# EAGLE board module_RevC_panelized (EAGLE 9.1.1), part 1 of 2
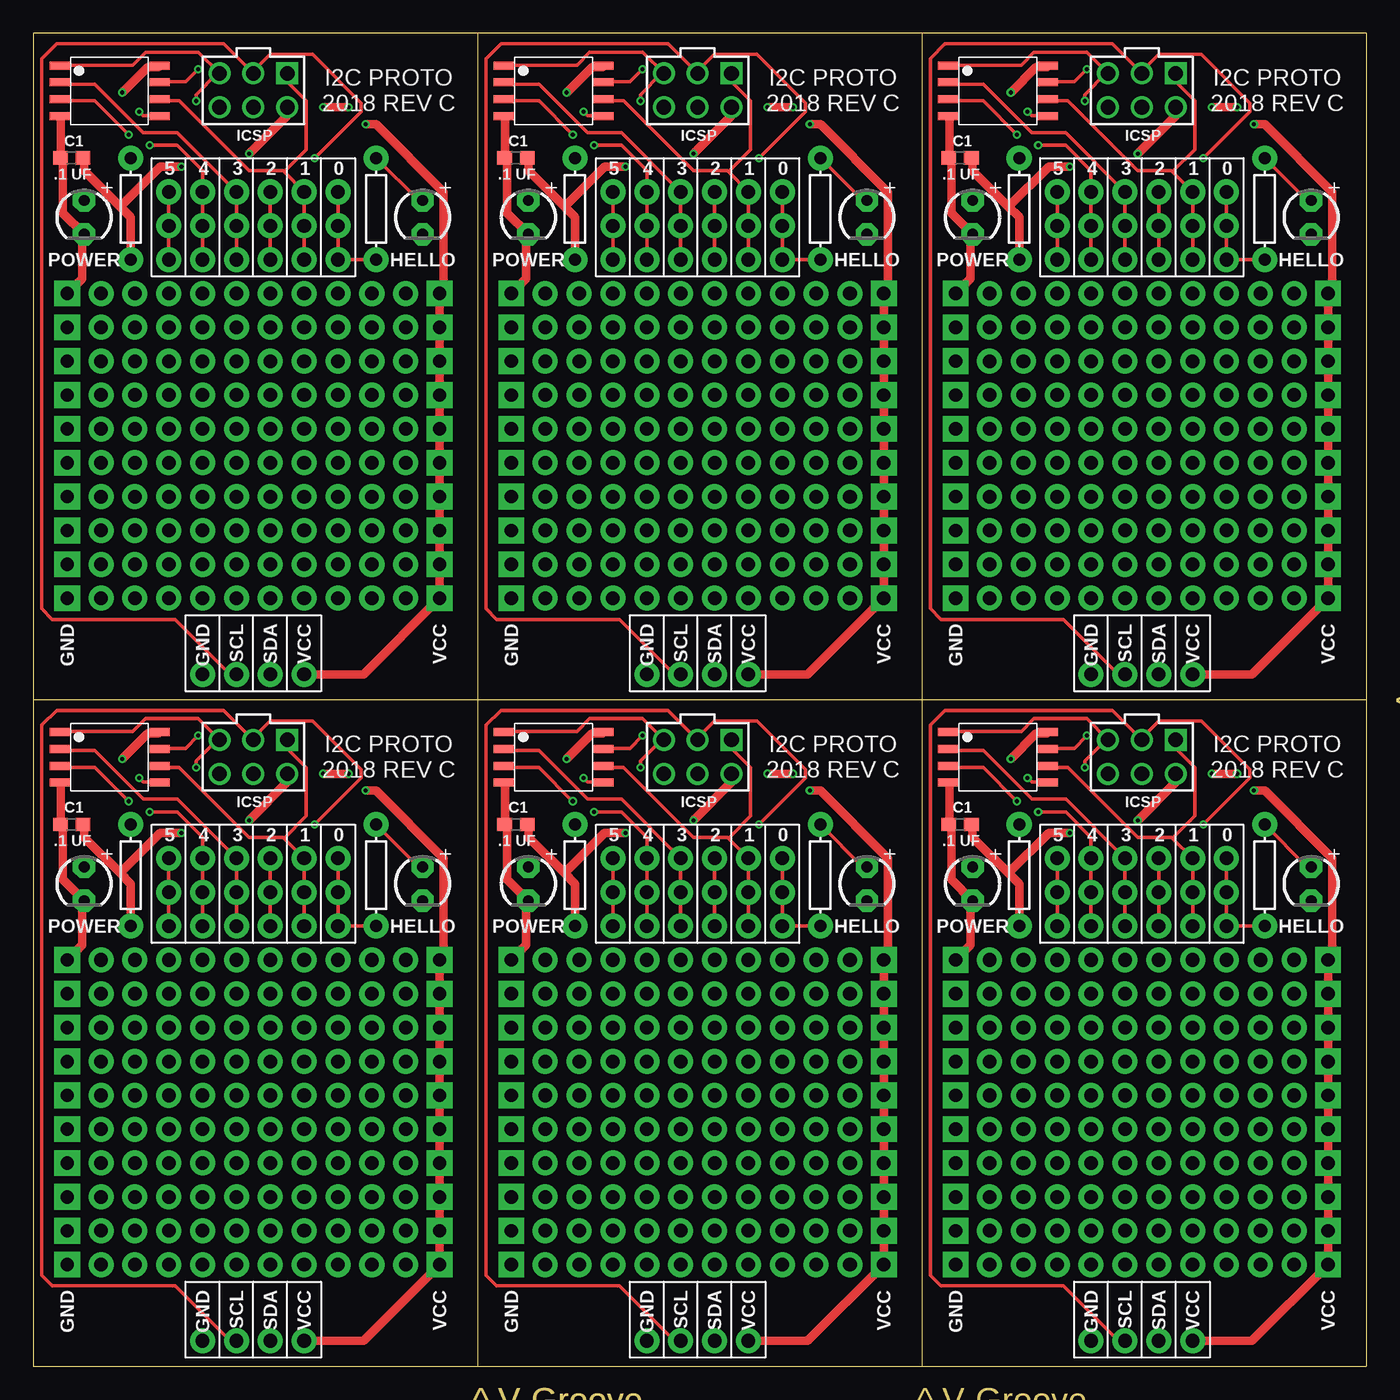
[diagram p0: board, top side]
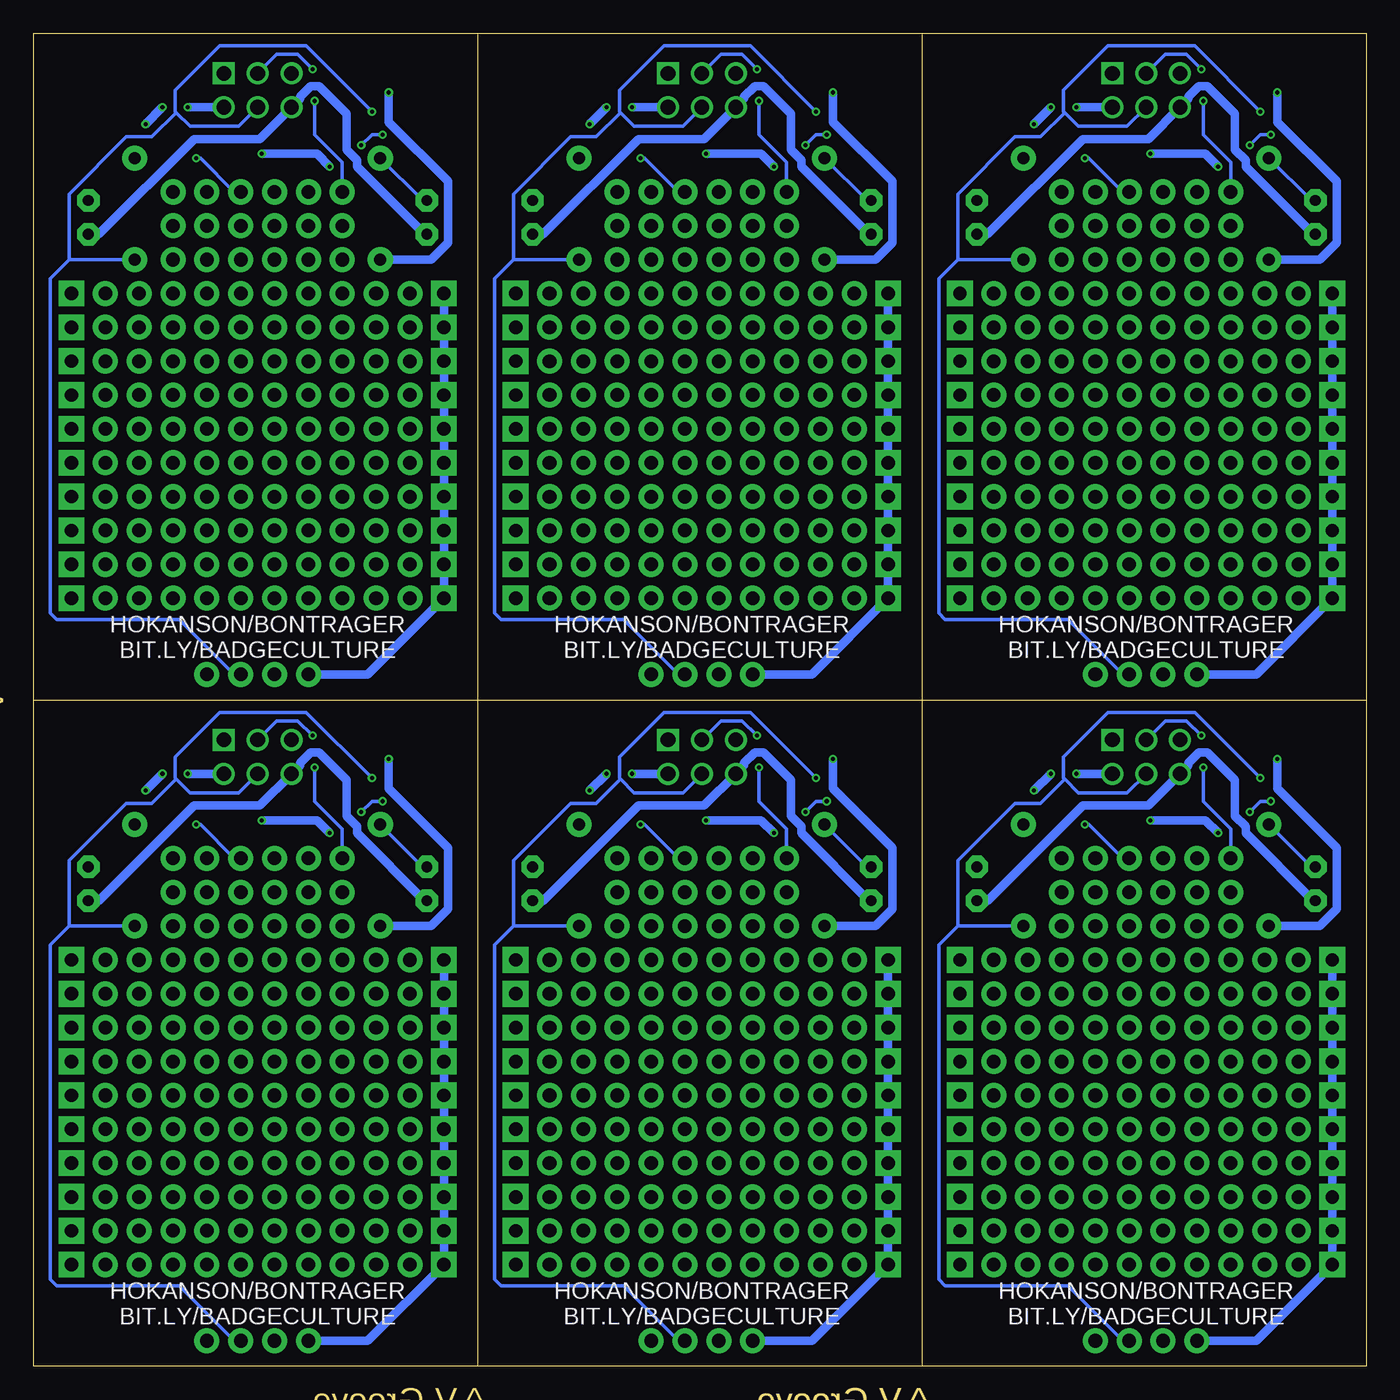
[diagram p1: board, bottom side, seen from below]

Size 100 x 100 mm. Coordinates in mm from the lower left corner, seen from the top.
Outline: 100,50 0,50
Outline: 66.67,100 66.67,0
Outline: 33.33,100 33.33,0
Outline: 100,100 100,0 0,0 0,100 100,100
Copper layers (1*16): Top 0.035mm / dielectric 1.5mm / Bottom 0.035mm
Design rules "SeeedStudio_2layer_DRU_no_angle_20140221": minimum track width 6mil, minimum drill 12mil, track to track 6mil, track to pad 6mil, pad to pad 6mil, via to via 6mil, smd to smd 0mil, copper to edge 10mil, drill to drill 10mil, minimum pad ring 10mil, minimum via ring 6mil, stop-mask expansion 2mil, vias tented up to drill 100mil, thermal gap 10mil
Net classes: 0 default: width 0.254 mm, clearance 0.381 mm; 1 VCC: width 0.635 mm, clearance 0.381 mm; 2 GND: width 0.635 mm, clearance 0.381 mm

## Footprints (pad centres in the part's own frame; a part is rotated, then mirrored left to right if it is on the bottom)
0603 = smd 1.1 x 1: 1 -0.85,0; 2 0.85,0
10X-PADS = drill 1 pad 1.93 square: P$1 0,0; P$2 0,-2.54; P$3 0,-5.08; P$4 0,-7.62; P$5 0,-10.16; P$6 0,-12.7; P$7 0,-15.24; P$8 0,-17.78; P$9 0,-20.32; P$10 0,-22.86
LED3MM = drill 0.813 pad 1.676 octagon: NEG 1.27,0; POS -1.27,0
SOT127P798X216-8N = smd 1.5 x 0.6: GND -3.75,-1.905; PB0 3.75,-1.905; PB1 3.75,-0.635; PB2 3.75,0.635; PB3 -3.75,0.635; PB4 -3.75,-0.635; PB5 -3.75,1.905; VCC 3.75,1.905
HDRV6W64P254_2X3_762X508X868P = drill 1.1 pad 1.65: 0/MOSI/SDA 0,1.27; 2/SCK/SCL 0,3.81; 5/RST -2.54,3.81; GND -2.54,1.27; VCC 2.54,1.27 | drill 1.1 pad 1.65 square: 1/MISO 2.54,3.81
AXIAL-0.3 = drill 0.9 pad 1.88: P$1 -3.81,0; P$2 3.81,0
1X01 = drill 1.016 pad 1.88: 1 0,0

## Placement (x,y rotation side)
C1  0.1uF  [0603]  2.88,40.64 0 top
C2  0.1uF  [0603]  36.21,40.64 0 top
C3  0.1uF  [0603]  69.54,40.64 0 top
C4  0.1uF  [0603]  2.88,90.64 0 top
C5  0.1uF  [0603]  36.21,90.64 0 top
C6  0.1uF  [0603]  69.54,90.64 0 top
GND  10X-PADS  [10X-PADS]  2.54,30.48 0 top
GND1  10X-PADS  [10X-PADS]  35.87,30.48 0 top
GND2  10X-PADS  [10X-PADS]  69.2,30.48 0 top
GND3  10X-PADS  [10X-PADS]  2.54,80.48 0 top
GND4  10X-PADS  [10X-PADS]  35.87,80.48 0 top
GND5  10X-PADS  [10X-PADS]  69.2,80.48 0 top
HELLO  LED3MM  [LED3MM]  29.21,36.2 270 top
HELLO1  LED3MM  [LED3MM]  62.54,36.2 270 top
HELLO2  LED3MM  [LED3MM]  95.87,36.2 270 top
HELLO3  LED3MM  [LED3MM]  29.21,86.19 270 top
HELLO4  LED3MM  [LED3MM]  62.54,86.19 270 top
HELLO5  LED3MM  [LED3MM]  95.87,86.19 270 top
IC1  ATTINY85-20SU  [SOT127P798X216-8N]  5.71,45.68 0 top
IC2  ATTINY85-20SU  [SOT127P798X216-8N]  39.05,45.68 0 top
IC3  ATTINY85-20SU  [SOT127P798X216-8N]  72.38,45.68 0 top
IC4  ATTINY85-20SU  [SOT127P798X216-8N]  5.71,95.68 0 top
IC5  ATTINY85-20SU  [SOT127P798X216-8N]  39.05,95.68 0 top
IC6  ATTINY85-20SU  [SOT127P798X216-8N]  72.38,95.68 0 top
J1  M20-9980346  [HDRV6W64P254_2X3_762X508X868P]  16.51,43.18 0 top
J2  M20-9980346  [HDRV6W64P254_2X3_762X508X868P]  49.84,43.18 0 top
J3  M20-9980346  [HDRV6W64P254_2X3_762X508X868P]  83.17,43.18 0 top
J4  M20-9980346  [HDRV6W64P254_2X3_762X508X868P]  16.51,93.18 0 top
J5  M20-9980346  [HDRV6W64P254_2X3_762X508X868P]  49.84,93.18 0 top
J6  M20-9980346  [HDRV6W64P254_2X3_762X508X868P]  83.17,93.18 0 top
POWER  LED3MM  [LED3MM]  3.81,36.2 270 top
POWER1  LED3MM  [LED3MM]  37.14,36.2 270 top
POWER2  LED3MM  [LED3MM]  70.47,36.2 270 top
POWER3  LED3MM  [LED3MM]  3.81,86.19 270 top
POWER4  LED3MM  [LED3MM]  37.14,86.19 270 top
POWER5  LED3MM  [LED3MM]  70.47,86.19 270 top
R1  220  [AXIAL-0.3]  7.3,36.83 270 top
R2  220  [AXIAL-0.3]  25.72,36.83 270 top
R3  220  [AXIAL-0.3]  40.63,36.83 270 top
R4  220  [AXIAL-0.3]  59.05,36.83 270 top
R5  220  [AXIAL-0.3]  73.96,36.83 270 top
R6  220  [AXIAL-0.3]  92.38,36.83 270 top
R7  220  [AXIAL-0.3]  7.3,86.83 270 top
R8  220  [AXIAL-0.3]  25.72,86.83 270 top
R9  220  [AXIAL-0.3]  40.63,86.83 270 top
R10  220  [AXIAL-0.3]  59.05,86.83 270 top
R11  220  [AXIAL-0.3]  73.96,86.83 270 top
R12  220  [AXIAL-0.3]  92.38,86.83 270 top
U$1  ONE_PAD  [1X01]  7.62,15.24 0 top
U$2  ONE_PAD  [1X01]  5.08,22.86 0 top
U$3  ONE_PAD  [1X01]  5.08,20.32 0 top
U$4  ONE_PAD  [1X01]  5.08,17.78 0 top
U$5  ONE_PAD  [1X01]  5.08,15.24 0 top
U$6  ONE_PAD  [1X01]  5.08,12.7 0 top
U$7  ONE_PAD  [1X01]  5.08,10.16 0 top
U$8  ONE_PAD  [1X01]  5.08,7.62 0 top
U$9  ONE_PAD  [1X01]  7.62,22.86 0 top
U$10  ONE_PAD  [1X01]  7.62,12.7 90 top
U$11  ONE_PAD  [1X01]  7.62,20.32 0 top
U$12  ONE_PAD  [1X01]  7.62,10.16 0 top
U$13  ONE_PAD  [1X01]  7.62,17.78 0 top
U$14  ONE_PAD  [1X01]  7.62,7.62 0 top
U$15  ONE_PAD  [1X01]  10.16,22.86 0 top
U$16  ONE_PAD  [1X01]  12.7,22.86 0 top
U$17  ONE_PAD  [1X01]  10.16,10.16 0 top
U$18  ONE_PAD  [1X01]  10.16,20.32 0 top
U$19  ONE_PAD  [1X01]  12.7,20.32 0 top
U$20  ONE_PAD  [1X01]  10.16,7.62 0 top
U$21  ONE_PAD  [1X01]  10.16,17.78 0 top
U$22  ONE_PAD  [1X01]  12.7,17.78 0 top
U$23  ONE_PAD  [1X01]  12.7,10.16 0 top
U$24  ONE_PAD  [1X01]  10.16,15.24 0 top
U$25  ONE_PAD  [1X01]  12.7,15.24 0 top
U$26  ONE_PAD  [1X01]  12.7,7.62 0 top
U$27  ONE_PAD  [1X01]  10.16,12.7 0 top
U$28  ONE_PAD  [1X01]  12.7,12.7 0 top
U$29  ONE_PAD  [1X01]  15.24,22.86 0 top
U$30  ONE_PAD  [1X01]  17.78,22.86 0 top
U$31  ONE_PAD  [1X01]  20.32,22.86 0 top
U$32  ONE_PAD  [1X01]  22.86,22.86 0 top
U$33  ONE_PAD  [1X01]  15.24,20.32 0 top
U$34  ONE_PAD  [1X01]  17.78,20.32 0 top
U$35  ONE_PAD  [1X01]  20.32,20.32 0 top
U$36  ONE_PAD  [1X01]  22.86,20.32 0 top
U$37  ONE_PAD  [1X01]  15.24,17.78 0 top
U$38  ONE_PAD  [1X01]  17.78,17.78 0 top
U$39  ONE_PAD  [1X01]  20.32,17.78 0 top
U$40  ONE_PAD  [1X01]  22.86,17.78 0 top
U$41  ONE_PAD  [1X01]  15.24,15.24 0 top
U$42  ONE_PAD  [1X01]  17.78,15.24 0 top
U$43  ONE_PAD  [1X01]  20.32,15.24 0 top
U$44  ONE_PAD  [1X01]  22.86,15.24 0 top
U$45  ONE_PAD  [1X01]  15.24,12.7 0 top
U$46  ONE_PAD  [1X01]  17.78,12.7 0 top
U$47  ONE_PAD  [1X01]  20.32,12.7 0 top
U$48  ONE_PAD  [1X01]  22.86,12.7 0 top
U$49  ONE_PAD  [1X01]  15.24,10.16 0 top
U$50  ONE_PAD  [1X01]  17.78,10.16 0 top
U$51  ONE_PAD  [1X01]  20.32,10.16 0 top
U$52  ONE_PAD  [1X01]  22.86,10.16 0 top
U$53  ONE_PAD  [1X01]  15.24,7.62 0 top
U$54  ONE_PAD  [1X01]  17.78,7.62 0 top
U$55  ONE_PAD  [1X01]  20.32,7.62 0 top
U$56  ONE_PAD  [1X01]  22.86,7.62 0 top
U$57  ONE_PAD  [1X01]  25.4,22.86 0 top
U$58  ONE_PAD  [1X01]  27.94,22.86 0 top
U$59  ONE_PAD  [1X01]  25.4,10.16 0 top
U$60  ONE_PAD  [1X01]  25.4,20.32 0 top
U$61  ONE_PAD  [1X01]  27.94,20.32 0 top
U$62  ONE_PAD  [1X01]  25.4,7.62 0 top
U$63  ONE_PAD  [1X01]  25.4,17.78 0 top
U$64  ONE_PAD  [1X01]  27.94,17.78 0 top
U$65  ONE_PAD  [1X01]  27.94,10.16 0 top
U$66  ONE_PAD  [1X01]  25.4,15.24 0 top
U$67  ONE_PAD  [1X01]  27.94,15.24 0 top
U$68  ONE_PAD  [1X01]  27.94,7.62 0 top
U$69  ONE_PAD  [1X01]  25.4,12.7 0 top
U$70  ONE_PAD  [1X01]  27.94,12.7 0 top
U$71  GND  [1X01]  12.7,1.91 180 top
U$72  SDA  [1X01]  17.78,1.91 0 top
U$73  SCL  [1X01]  15.24,1.91 0 top
U$74  VCC  [1X01]  20.32,1.91 90 top
U$75  ONE_PAD  [1X01]  22.86,38.1 0 top
U$76  ONE_PAD  [1X01]  22.86,35.56 0 top
U$77  ONE_PAD  [1X01]  22.86,33.02 0 top
U$78  ONE_PAD  [1X01]  20.32,38.1 0 top
U$79  ONE_PAD  [1X01]  20.32,35.56 0 top
U$80  ONE_PAD  [1X01]  20.32,33.02 0 top
U$81  ONE_PAD  [1X01]  17.78,38.1 0 top
U$82  ONE_PAD  [1X01]  17.78,33.02 0 top
U$83  ONE_PAD  [1X01]  17.78,35.56 0 top
U$84  ONE_PAD  [1X01]  15.24,38.1 0 top
U$85  ONE_PAD  [1X01]  15.24,33.02 0 top
U$86  ONE_PAD  [1X01]  15.24,35.56 0 top
U$87  ONE_PAD  [1X01]  12.7,35.56 0 top
U$88  ONE_PAD  [1X01]  12.7,38.1 0 top
U$89  ONE_PAD  [1X01]  12.7,33.02 0 top
U$90  ONE_PAD  [1X01]  10.16,35.56 0 top
U$91  ONE_PAD  [1X01]  10.16,38.1 0 top
U$92  ONE_PAD  [1X01]  10.16,33.02 0 top
U$93  ONE_PAD  [1X01]  5.08,25.4 90 top
U$94  ONE_PAD  [1X01]  5.08,27.94 90 top
U$95  ONE_PAD  [1X01]  5.08,30.48 90 top
U$96  ONE_PAD  [1X01]  22.86,30.48 90 top
U$97  ONE_PAD  [1X01]  7.62,25.4 90 top
U$98  ONE_PAD  [1X01]  7.62,27.94 90 top
U$99  ONE_PAD  [1X01]  7.62,30.48 90 top
U$100  ONE_PAD  [1X01]  25.4,30.48 90 top
U$101  ONE_PAD  [1X01]  10.16,25.4 90 top
U$102  ONE_PAD  [1X01]  10.16,27.94 90 top
U$103  ONE_PAD  [1X01]  10.16,30.48 90 top
U$104  ONE_PAD  [1X01]  27.94,30.48 90 top
U$105  ONE_PAD  [1X01]  12.7,25.4 90 top
U$106  ONE_PAD  [1X01]  12.7,27.94 90 top
U$107  ONE_PAD  [1X01]  12.7,30.48 90 top
U$108  ONE_PAD  [1X01]  25.4,27.94 90 top
U$109  ONE_PAD  [1X01]  15.24,25.4 90 top
U$110  ONE_PAD  [1X01]  15.24,27.94 90 top
U$111  ONE_PAD  [1X01]  15.24,30.48 90 top
U$112  ONE_PAD  [1X01]  27.94,27.94 90 top
U$113  ONE_PAD  [1X01]  17.78,25.4 90 top
U$114  ONE_PAD  [1X01]  17.78,27.94 90 top
U$115  ONE_PAD  [1X01]  17.78,30.48 90 top
U$116  ONE_PAD  [1X01]  25.4,25.4 90 top
U$117  ONE_PAD  [1X01]  20.32,25.4 90 top
U$118  ONE_PAD  [1X01]  20.32,27.94 90 top
U$119  ONE_PAD  [1X01]  20.32,30.48 90 top
U$120  ONE_PAD  [1X01]  27.94,25.4 90 top
U$121  ONE_PAD  [1X01]  22.86,25.4 90 top
U$122  ONE_PAD  [1X01]  22.86,27.94 90 top
U$123  ONE_PAD  [1X01]  38.41,22.86 0 top
U$124  ONE_PAD  [1X01]  38.41,20.32 0 top
U$125  ONE_PAD  [1X01]  38.41,17.78 0 top
U$126  ONE_PAD  [1X01]  38.41,15.24 0 top
U$127  ONE_PAD  [1X01]  38.41,12.7 0 top
U$128  ONE_PAD  [1X01]  38.41,10.16 0 top
U$129  ONE_PAD  [1X01]  38.41,7.62 0 top
U$130  ONE_PAD  [1X01]  40.95,15.24 0 top
U$131  ONE_PAD  [1X01]  40.95,22.86 0 top
U$132  ONE_PAD  [1X01]  40.95,12.7 90 top
U$133  ONE_PAD  [1X01]  40.95,20.32 0 top
U$134  ONE_PAD  [1X01]  40.95,10.16 0 top
U$135  ONE_PAD  [1X01]  40.95,17.78 0 top
U$136  ONE_PAD  [1X01]  40.95,7.62 0 top
U$137  ONE_PAD  [1X01]  43.49,22.86 0 top
U$138  ONE_PAD  [1X01]  46.03,22.86 0 top
U$139  ONE_PAD  [1X01]  43.49,10.16 0 top
U$140  ONE_PAD  [1X01]  43.49,20.32 0 top
U$141  ONE_PAD  [1X01]  46.03,20.32 0 top
U$142  ONE_PAD  [1X01]  43.49,7.62 0 top
U$143  ONE_PAD  [1X01]  43.49,17.78 0 top
U$144  ONE_PAD  [1X01]  46.03,17.78 0 top
U$145  ONE_PAD  [1X01]  46.03,10.16 0 top
U$146  ONE_PAD  [1X01]  43.49,15.24 0 top
U$147  ONE_PAD  [1X01]  46.03,15.24 0 top
U$148  ONE_PAD  [1X01]  46.03,7.62 0 top
U$149  ONE_PAD  [1X01]  43.49,12.7 0 top
U$150  ONE_PAD  [1X01]  46.03,12.7 0 top
U$151  ONE_PAD  [1X01]  48.57,22.86 0 top
U$152  ONE_PAD  [1X01]  51.11,22.86 0 top
U$153  ONE_PAD  [1X01]  53.65,22.86 0 top
U$154  ONE_PAD  [1X01]  56.19,22.86 0 top
U$155  ONE_PAD  [1X01]  48.57,20.32 0 top
U$156  ONE_PAD  [1X01]  51.11,20.32 0 top
U$157  ONE_PAD  [1X01]  53.65,20.32 0 top
U$158  ONE_PAD  [1X01]  56.19,20.32 0 top
U$159  ONE_PAD  [1X01]  48.57,17.78 0 top
U$160  ONE_PAD  [1X01]  51.11,17.78 0 top
U$161  ONE_PAD  [1X01]  53.65,17.78 0 top
U$162  ONE_PAD  [1X01]  56.19,17.78 0 top
U$163  ONE_PAD  [1X01]  48.57,15.24 0 top
U$164  ONE_PAD  [1X01]  51.11,15.24 0 top
U$165  ONE_PAD  [1X01]  53.65,15.24 0 top
U$166  ONE_PAD  [1X01]  56.19,15.24 0 top
U$167  ONE_PAD  [1X01]  48.57,12.7 0 top
U$168  ONE_PAD  [1X01]  51.11,12.7 0 top
U$169  ONE_PAD  [1X01]  53.65,12.7 0 top
U$170  ONE_PAD  [1X01]  56.19,12.7 0 top
U$171  ONE_PAD  [1X01]  48.57,10.16 0 top
U$172  ONE_PAD  [1X01]  51.11,10.16 0 top
U$173  ONE_PAD  [1X01]  53.65,10.16 0 top
U$174  ONE_PAD  [1X01]  56.19,10.16 0 top
U$175  ONE_PAD  [1X01]  48.57,7.62 0 top
U$176  ONE_PAD  [1X01]  51.11,7.62 0 top
U$177  ONE_PAD  [1X01]  53.65,7.62 0 top
U$178  ONE_PAD  [1X01]  56.19,7.62 0 top
U$179  ONE_PAD  [1X01]  58.73,22.86 0 top
U$180  ONE_PAD  [1X01]  61.27,22.86 0 top
U$181  ONE_PAD  [1X01]  58.73,10.16 0 top
U$182  ONE_PAD  [1X01]  58.73,20.32 0 top
U$183  ONE_PAD  [1X01]  61.27,20.32 0 top
U$184  ONE_PAD  [1X01]  58.73,7.62 0 top
U$185  ONE_PAD  [1X01]  58.73,17.78 0 top
U$186  ONE_PAD  [1X01]  61.27,17.78 0 top
U$187  ONE_PAD  [1X01]  61.27,10.16 0 top
U$188  ONE_PAD  [1X01]  58.73,15.24 0 top
U$189  ONE_PAD  [1X01]  61.27,15.24 0 top
U$190  ONE_PAD  [1X01]  61.27,7.62 0 top
U$191  ONE_PAD  [1X01]  58.73,12.7 0 top
U$192  ONE_PAD  [1X01]  61.27,12.7 0 top
U$193  GND  [1X01]  46.03,1.91 180 top
U$194  VCC  [1X01]  53.65,1.91 90 top
U$195  SDA  [1X01]  51.11,1.91 0 top
U$196  SCL  [1X01]  48.57,1.91 0 top
U$197  ONE_PAD  [1X01]  56.19,38.1 0 top
U$198  ONE_PAD  [1X01]  56.19,35.56 0 top
U$199  ONE_PAD  [1X01]  56.19,33.02 0 top
U$200  ONE_PAD  [1X01]  53.65,38.1 0 top
U$201  ONE_PAD  [1X01]  53.65,35.56 0 top
U$202  ONE_PAD  [1X01]  53.65,33.02 0 top
U$203  ONE_PAD  [1X01]  51.11,38.1 0 top
U$204  ONE_PAD  [1X01]  51.11,33.02 0 top
U$205  ONE_PAD  [1X01]  51.11,35.56 0 top
U$206  ONE_PAD  [1X01]  48.57,38.1 0 top
U$207  ONE_PAD  [1X01]  48.57,33.02 0 top
U$208  ONE_PAD  [1X01]  48.57,35.56 0 top
U$209  ONE_PAD  [1X01]  46.03,35.56 0 top
U$210  ONE_PAD  [1X01]  46.03,38.1 0 top
U$211  ONE_PAD  [1X01]  46.03,33.02 0 top
U$212  ONE_PAD  [1X01]  43.49,35.56 0 top
U$213  ONE_PAD  [1X01]  43.49,38.1 0 top
U$214  ONE_PAD  [1X01]  43.49,33.02 0 top
U$215  ONE_PAD  [1X01]  38.41,25.4 90 top
U$216  ONE_PAD  [1X01]  38.41,27.94 90 top
U$217  ONE_PAD  [1X01]  38.41,30.48 90 top
U$218  ONE_PAD  [1X01]  56.19,30.48 90 top
U$219  ONE_PAD  [1X01]  40.95,25.4 90 top
U$220  ONE_PAD  [1X01]  40.95,27.94 90 top
U$221  ONE_PAD  [1X01]  40.95,30.48 90 top
U$222  ONE_PAD  [1X01]  58.73,30.48 90 top
U$223  ONE_PAD  [1X01]  43.49,25.4 90 top
U$224  ONE_PAD  [1X01]  43.49,27.94 90 top
U$225  ONE_PAD  [1X01]  43.49,30.48 90 top
U$226  ONE_PAD  [1X01]  61.27,30.48 90 top
U$227  ONE_PAD  [1X01]  46.03,25.4 90 top
U$228  ONE_PAD  [1X01]  46.03,27.94 90 top
U$229  ONE_PAD  [1X01]  46.03,30.48 90 top
U$230  ONE_PAD  [1X01]  58.73,27.94 90 top
U$231  ONE_PAD  [1X01]  48.57,25.4 90 top
U$232  ONE_PAD  [1X01]  48.57,27.94 90 top
U$233  ONE_PAD  [1X01]  48.57,30.48 90 top
U$234  ONE_PAD  [1X01]  61.27,27.94 90 top
U$235  ONE_PAD  [1X01]  51.11,25.4 90 top
U$236  ONE_PAD  [1X01]  51.11,27.94 90 top
U$237  ONE_PAD  [1X01]  51.11,30.48 90 top
U$238  ONE_PAD  [1X01]  58.73,25.4 90 top
U$239  ONE_PAD  [1X01]  53.65,25.4 90 top
U$240  ONE_PAD  [1X01]  53.65,27.94 90 top
U$241  ONE_PAD  [1X01]  53.65,30.48 90 top
U$242  ONE_PAD  [1X01]  61.27,25.4 90 top
U$243  ONE_PAD  [1X01]  56.19,25.4 90 top
U$244  ONE_PAD  [1X01]  56.19,27.94 90 top
U$245  ONE_PAD  [1X01]  71.74,22.86 0 top
U$246  ONE_PAD  [1X01]  71.74,20.32 0 top
U$247  ONE_PAD  [1X01]  71.74,17.78 0 top
U$248  ONE_PAD  [1X01]  71.74,15.24 0 top
U$249  ONE_PAD  [1X01]  71.74,12.7 0 top
U$250  ONE_PAD  [1X01]  71.74,10.16 0 top
U$251  ONE_PAD  [1X01]  71.74,7.62 0 top
U$252  ONE_PAD  [1X01]  74.28,15.24 0 top
U$253  ONE_PAD  [1X01]  74.28,22.86 0 top
U$254  ONE_PAD  [1X01]  74.28,12.7 90 top
U$255  ONE_PAD  [1X01]  74.28,20.32 0 top
U$256  ONE_PAD  [1X01]  74.28,10.16 0 top
U$257  ONE_PAD  [1X01]  74.28,17.78 0 top
U$258  ONE_PAD  [1X01]  74.28,7.62 0 top
U$259  ONE_PAD  [1X01]  76.82,22.86 0 top
U$260  ONE_PAD  [1X01]  79.36,22.86 0 top
U$261  ONE_PAD  [1X01]  76.82,10.16 0 top
U$262  ONE_PAD  [1X01]  76.82,20.32 0 top
U$263  ONE_PAD  [1X01]  79.36,20.32 0 top
U$264  ONE_PAD  [1X01]  76.82,7.62 0 top
U$265  ONE_PAD  [1X01]  76.82,17.78 0 top
U$266  ONE_PAD  [1X01]  79.36,17.78 0 top
U$267  ONE_PAD  [1X01]  79.36,10.16 0 top
U$268  ONE_PAD  [1X01]  76.82,15.24 0 top
U$269  ONE_PAD  [1X01]  79.36,15.24 0 top
U$270  ONE_PAD  [1X01]  79.36,7.62 0 top
U$271  ONE_PAD  [1X01]  76.82,12.7 0 top
U$272  ONE_PAD  [1X01]  79.36,12.7 0 top
U$273  ONE_PAD  [1X01]  81.9,22.86 0 top
U$274  ONE_PAD  [1X01]  84.44,22.86 0 top
U$275  ONE_PAD  [1X01]  86.98,22.86 0 top
U$276  ONE_PAD  [1X01]  89.52,22.86 0 top
U$277  ONE_PAD  [1X01]  81.9,20.32 0 top
U$278  ONE_PAD  [1X01]  84.44,20.32 0 top
U$279  ONE_PAD  [1X01]  86.98,20.32 0 top
U$280  ONE_PAD  [1X01]  89.52,20.32 0 top
U$281  ONE_PAD  [1X01]  81.9,17.78 0 top
U$282  ONE_PAD  [1X01]  84.44,17.78 0 top
U$283  ONE_PAD  [1X01]  86.98,17.78 0 top
U$284  ONE_PAD  [1X01]  89.52,17.78 0 top
U$285  ONE_PAD  [1X01]  81.9,15.24 0 top
U$286  ONE_PAD  [1X01]  84.44,15.24 0 top
U$287  ONE_PAD  [1X01]  86.98,15.24 0 top
U$288  ONE_PAD  [1X01]  89.52,15.24 0 top
U$289  ONE_PAD  [1X01]  81.9,12.7 0 top
U$290  ONE_PAD  [1X01]  84.44,12.7 0 top
U$291  ONE_PAD  [1X01]  86.98,12.7 0 top
U$292  ONE_PAD  [1X01]  89.52,12.7 0 top
U$293  ONE_PAD  [1X01]  81.9,10.16 0 top
U$294  ONE_PAD  [1X01]  84.44,10.16 0 top
U$295  ONE_PAD  [1X01]  86.98,10.16 0 top
U$296  ONE_PAD  [1X01]  89.52,10.16 0 top
U$297  ONE_PAD  [1X01]  81.9,7.62 0 top
U$298  ONE_PAD  [1X01]  84.44,7.62 0 top
U$299  ONE_PAD  [1X01]  86.98,7.62 0 top
U$300  ONE_PAD  [1X01]  89.52,7.62 0 top
U$301  ONE_PAD  [1X01]  92.06,22.86 0 top
U$302  ONE_PAD  [1X01]  94.6,22.86 0 top
U$303  ONE_PAD  [1X01]  92.06,10.16 0 top
U$304  ONE_PAD  [1X01]  92.06,20.32 0 top
U$305  ONE_PAD  [1X01]  94.6,20.32 0 top
U$306  ONE_PAD  [1X01]  92.06,7.62 0 top
U$307  ONE_PAD  [1X01]  92.06,17.78 0 top
U$308  ONE_PAD  [1X01]  94.6,17.78 0 top
U$309  ONE_PAD  [1X01]  94.6,10.16 0 top
U$310  ONE_PAD  [1X01]  92.06,15.24 0 top
U$311  ONE_PAD  [1X01]  94.6,15.24 0 top
U$312  ONE_PAD  [1X01]  94.6,7.62 0 top
U$313  ONE_PAD  [1X01]  92.06,12.7 0 top
U$314  ONE_PAD  [1X01]  94.6,12.7 0 top
U$315  GND  [1X01]  79.36,1.91 180 top
U$316  VCC  [1X01]  86.98,1.91 90 top
U$317  SDA  [1X01]  84.44,1.91 0 top
U$318  SCL  [1X01]  81.9,1.91 0 top
U$319  ONE_PAD  [1X01]  89.52,38.1 0 top
U$320  ONE_PAD  [1X01]  89.52,35.56 0 top
U$321  ONE_PAD  [1X01]  89.52,33.02 0 top
U$322  ONE_PAD  [1X01]  86.98,38.1 0 top
U$323  ONE_PAD  [1X01]  86.98,35.56 0 top
U$324  ONE_PAD  [1X01]  86.98,33.02 0 top
U$325  ONE_PAD  [1X01]  84.44,38.1 0 top
U$326  ONE_PAD  [1X01]  84.44,33.02 0 top
U$327  ONE_PAD  [1X01]  84.44,35.56 0 top
U$328  ONE_PAD  [1X01]  81.9,38.1 0 top
U$329  ONE_PAD  [1X01]  81.9,33.02 0 top
U$330  ONE_PAD  [1X01]  81.9,35.56 0 top
U$331  ONE_PAD  [1X01]  79.36,35.56 0 top
U$332  ONE_PAD  [1X01]  79.36,38.1 0 top
U$333  ONE_PAD  [1X01]  79.36,33.02 0 top
U$334  ONE_PAD  [1X01]  76.82,35.56 0 top
U$335  ONE_PAD  [1X01]  76.82,38.1 0 top
U$336  ONE_PAD  [1X01]  76.82,33.02 0 top
U$337  ONE_PAD  [1X01]  71.74,25.4 90 top
U$338  ONE_PAD  [1X01]  71.74,27.94 90 top
U$339  ONE_PAD  [1X01]  71.74,30.48 90 top
U$340  ONE_PAD  [1X01]  89.52,30.48 90 top
U$341  ONE_PAD  [1X01]  74.28,25.4 90 top
U$342  ONE_PAD  [1X01]  74.28,27.94 90 top
U$343  ONE_PAD  [1X01]  74.28,30.48 90 top
U$344  ONE_PAD  [1X01]  92.06,30.48 90 top
U$345  ONE_PAD  [1X01]  76.82,25.4 90 top
U$346  ONE_PAD  [1X01]  76.82,27.94 90 top
U$347  ONE_PAD  [1X01]  76.82,30.48 90 top
U$348  ONE_PAD  [1X01]  94.6,30.48 90 top
U$349  ONE_PAD  [1X01]  79.36,25.4 90 top
U$350  ONE_PAD  [1X01]  79.36,27.94 90 top
U$351  ONE_PAD  [1X01]  79.36,30.48 90 top
U$352  ONE_PAD  [1X01]  92.06,27.94 90 top
U$353  ONE_PAD  [1X01]  81.9,25.4 90 top
U$354  ONE_PAD  [1X01]  81.9,27.94 90 top
U$355  ONE_PAD  [1X01]  81.9,30.48 90 top
U$356  ONE_PAD  [1X01]  94.6,27.94 90 top
U$357  ONE_PAD  [1X01]  84.44,25.4 90 top
U$358  ONE_PAD  [1X01]  84.44,27.94 90 top
U$359  ONE_PAD  [1X01]  84.44,30.48 90 top
U$360  ONE_PAD  [1X01]  92.06,25.4 90 top
U$361  ONE_PAD  [1X01]  86.98,25.4 90 top
U$362  ONE_PAD  [1X01]  86.98,27.94 90 top
U$363  ONE_PAD  [1X01]  86.98,30.48 90 top
U$364  ONE_PAD  [1X01]  94.6,25.4 90 top
U$365  ONE_PAD  [1X01]  89.52,25.4 90 top
U$366  ONE_PAD  [1X01]  89.52,27.94 90 top
U$367  ONE_PAD  [1X01]  5.08,72.86 0 top
U$368  ONE_PAD  [1X01]  5.08,70.32 0 top
U$369  ONE_PAD  [1X01]  5.08,67.78 0 top
U$370  ONE_PAD  [1X01]  5.08,65.24 0 top
U$371  ONE_PAD  [1X01]  5.08,62.7 0 top
U$372  ONE_PAD  [1X01]  5.08,60.16 0 top
U$373  ONE_PAD  [1X01]  5.08,57.62 0 top
U$374  ONE_PAD  [1X01]  7.62,65.24 0 top
U$375  ONE_PAD  [1X01]  7.62,72.86 0 top
U$376  ONE_PAD  [1X01]  7.62,62.7 90 top
U$377  ONE_PAD  [1X01]  7.62,70.32 0 top
U$378  ONE_PAD  [1X01]  7.62,60.16 0 top
U$379  ONE_PAD  [1X01]  7.62,67.78 0 top
U$380  ONE_PAD  [1X01]  7.62,57.62 0 top
U$381  ONE_PAD  [1X01]  10.16,72.86 0 top
U$382  ONE_PAD  [1X01]  12.7,72.86 0 top
U$383  ONE_PAD  [1X01]  10.16,60.16 0 top
U$384  ONE_PAD  [1X01]  10.16,70.32 0 top
U$385  ONE_PAD  [1X01]  12.7,70.32 0 top
U$386  ONE_PAD  [1X01]  10.16,57.62 0 top
U$387  ONE_PAD  [1X01]  10.16,67.78 0 top
U$388  ONE_PAD  [1X01]  12.7,67.78 0 top
U$389  ONE_PAD  [1X01]  12.7,60.16 0 top
U$390  ONE_PAD  [1X01]  10.16,65.24 0 top
U$391  ONE_PAD  [1X01]  12.7,65.24 0 top
U$392  ONE_PAD  [1X01]  12.7,57.62 0 top
U$393  ONE_PAD  [1X01]  10.16,62.7 0 top
U$394  ONE_PAD  [1X01]  12.7,62.7 0 top
U$395  ONE_PAD  [1X01]  15.24,72.86 0 top
U$396  ONE_PAD  [1X01]  17.78,72.86 0 top
U$397  ONE_PAD  [1X01]  20.32,72.86 0 top
U$398  ONE_PAD  [1X01]  22.86,72.86 0 top
U$399  ONE_PAD  [1X01]  15.24,70.32 0 top
U$400  ONE_PAD  [1X01]  17.78,70.32 0 top
U$401  ONE_PAD  [1X01]  20.32,70.32 0 top
U$402  ONE_PAD  [1X01]  22.86,70.32 0 top
U$403  ONE_PAD  [1X01]  15.24,67.78 0 top
U$404  ONE_PAD  [1X01]  17.78,67.78 0 top
U$405  ONE_PAD  [1X01]  20.32,67.78 0 top
U$406  ONE_PAD  [1X01]  22.86,67.78 0 top
U$407  ONE_PAD  [1X01]  15.24,65.24 0 top
U$408  ONE_PAD  [1X01]  17.78,65.24 0 top
U$409  ONE_PAD  [1X01]  20.32,65.24 0 top
U$410  ONE_PAD  [1X01]  22.86,65.24 0 top
U$411  ONE_PAD  [1X01]  15.24,62.7 0 top
U$412  ONE_PAD  [1X01]  17.78,62.7 0 top
U$413  ONE_PAD  [1X01]  20.32,62.7 0 top
U$414  ONE_PAD  [1X01]  22.86,62.7 0 top
U$415  ONE_PAD  [1X01]  15.24,60.16 0 top
U$416  ONE_PAD  [1X01]  17.78,60.16 0 top
U$417  ONE_PAD  [1X01]  20.32,60.16 0 top
U$418  ONE_PAD  [1X01]  22.86,60.16 0 top
U$419  ONE_PAD  [1X01]  15.24,57.62 0 top
U$420  ONE_PAD  [1X01]  17.78,57.62 0 top
U$421  ONE_PAD  [1X01]  20.32,57.62 0 top
U$422  ONE_PAD  [1X01]  22.86,57.62 0 top
U$423  ONE_PAD  [1X01]  25.4,72.86 0 top
U$424  ONE_PAD  [1X01]  27.94,72.86 0 top
U$425  ONE_PAD  [1X01]  25.4,60.16 0 top
U$426  ONE_PAD  [1X01]  25.4,70.32 0 top
U$427  ONE_PAD  [1X01]  27.94,70.32 0 top
U$428  ONE_PAD  [1X01]  25.4,57.62 0 top
U$429  ONE_PAD  [1X01]  25.4,67.78 0 top
U$430  ONE_PAD  [1X01]  27.94,67.78 0 top
U$431  ONE_PAD  [1X01]  27.94,60.16 0 top
U$432  ONE_PAD  [1X01]  25.4,65.24 0 top
U$433  ONE_PAD  [1X01]  27.94,65.24 0 top
U$434  ONE_PAD  [1X01]  27.94,57.62 0 top
U$435  ONE_PAD  [1X01]  25.4,62.7 0 top
U$436  ONE_PAD  [1X01]  27.94,62.7 0 top
U$437  GND  [1X01]  12.7,51.91 180 top
U$438  VCC  [1X01]  20.32,51.91 90 top
U$439  SDA  [1X01]  17.78,51.91 0 top
U$440  SCL  [1X01]  15.24,51.91 0 top
U$441  ONE_PAD  [1X01]  22.86,88.1 0 top
U$442  ONE_PAD  [1X01]  22.86,85.56 0 top
U$443  ONE_PAD  [1X01]  22.86,83.02 0 top
U$444  ONE_PAD  [1X01]  20.32,88.1 0 top
U$445  ONE_PAD  [1X01]  20.32,85.56 0 top
U$446  ONE_PAD  [1X01]  20.32,83.02 0 top
U$447  ONE_PAD  [1X01]  17.78,88.1 0 top
U$448  ONE_PAD  [1X01]  17.78,83.02 0 top
U$449  ONE_PAD  [1X01]  17.78,85.56 0 top
U$450  ONE_PAD  [1X01]  15.24,88.1 0 top
U$451  ONE_PAD  [1X01]  15.24,83.02 0 top
U$452  ONE_PAD  [1X01]  15.24,85.56 0 top
U$453  ONE_PAD  [1X01]  12.7,85.56 0 top
U$454  ONE_PAD  [1X01]  12.7,88.1 0 top
U$455  ONE_PAD  [1X01]  12.7,83.02 0 top
U$456  ONE_PAD  [1X01]  10.16,85.56 0 top
U$457  ONE_PAD  [1X01]  10.16,88.1 0 top
U$458  ONE_PAD  [1X01]  10.16,83.02 0 top
U$459  ONE_PAD  [1X01]  5.08,75.4 90 top
U$460  ONE_PAD  [1X01]  5.08,77.94 90 top
U$461  ONE_PAD  [1X01]  5.08,80.48 90 top
U$462  ONE_PAD  [1X01]  22.86,80.48 90 top
U$463  ONE_PAD  [1X01]  7.62,75.4 90 top
U$464  ONE_PAD  [1X01]  7.62,77.94 90 top
U$465  ONE_PAD  [1X01]  7.62,80.48 90 top
U$466  ONE_PAD  [1X01]  25.4,80.48 90 top
U$467  ONE_PAD  [1X01]  10.16,75.4 90 top
U$468  ONE_PAD  [1X01]  10.16,77.94 90 top
U$469  ONE_PAD  [1X01]  10.16,80.48 90 top
U$470  ONE_PAD  [1X01]  27.94,80.48 90 top
U$471  ONE_PAD  [1X01]  12.7,75.4 90 top
U$472  ONE_PAD  [1X01]  12.7,77.94 90 top
U$473  ONE_PAD  [1X01]  12.7,80.48 90 top
U$474  ONE_PAD  [1X01]  25.4,77.94 90 top
U$475  ONE_PAD  [1X01]  15.24,75.4 90 top
U$476  ONE_PAD  [1X01]  15.24,77.94 90 top
U$477  ONE_PAD  [1X01]  15.24,80.48 90 top
U$478  ONE_PAD  [1X01]  27.94,77.94 90 top
U$479  ONE_PAD  [1X01]  17.78,75.4 90 top
U$480  ONE_PAD  [1X01]  17.78,77.94 90 top
U$481  ONE_PAD  [1X01]  17.78,80.48 90 top
U$482  ONE_PAD  [1X01]  25.4,75.4 90 top
U$483  ONE_PAD  [1X01]  20.32,75.4 90 top
U$484  ONE_PAD  [1X01]  20.32,77.94 90 top
U$485  ONE_PAD  [1X01]  20.32,80.48 90 top
U$486  ONE_PAD  [1X01]  27.94,75.4 90 top
U$487  ONE_PAD  [1X01]  22.86,75.4 90 top
U$488  ONE_PAD  [1X01]  22.86,77.94 90 top
U$489  ONE_PAD  [1X01]  38.41,72.86 0 top
U$490  ONE_PAD  [1X01]  38.41,70.32 0 top
U$491  ONE_PAD  [1X01]  38.41,67.78 0 top
U$492  ONE_PAD  [1X01]  38.41,65.24 0 top
U$493  ONE_PAD  [1X01]  38.41,62.7 0 top
U$494  ONE_PAD  [1X01]  38.41,60.16 0 top
U$495  ONE_PAD  [1X01]  38.41,57.62 0 top
U$496  ONE_PAD  [1X01]  40.95,65.24 0 top
U$497  ONE_PAD  [1X01]  40.95,72.86 0 top
U$498  ONE_PAD  [1X01]  40.95,62.7 90 top
U$499  ONE_PAD  [1X01]  40.95,70.32 0 top
U$500  ONE_PAD  [1X01]  40.95,60.16 0 top
U$501  ONE_PAD  [1X01]  40.95,67.78 0 top
U$502  ONE_PAD  [1X01]  40.95,57.62 0 top
U$503  ONE_PAD  [1X01]  43.49,72.86 0 top
U$504  ONE_PAD  [1X01]  46.03,72.86 0 top
U$505  ONE_PAD  [1X01]  43.49,60.16 0 top
U$506  ONE_PAD  [1X01]  43.49,70.32 0 top
U$507  ONE_PAD  [1X01]  46.03,70.32 0 top
U$508  ONE_PAD  [1X01]  43.49,57.62 0 top
U$509  ONE_PAD  [1X01]  43.49,67.78 0 top
U$510  ONE_PAD  [1X01]  46.03,67.78 0 top
U$511  ONE_PAD  [1X01]  46.03,60.16 0 top
U$512  ONE_PAD  [1X01]  43.49,65.24 0 top
U$513  ONE_PAD  [1X01]  46.03,65.24 0 top
U$514  ONE_PAD  [1X01]  46.03,57.62 0 top
U$515  ONE_PAD  [1X01]  43.49,62.7 0 top
U$516  ONE_PAD  [1X01]  46.03,62.7 0 top
U$517  ONE_PAD  [1X01]  48.57,72.86 0 top
U$518  ONE_PAD  [1X01]  51.11,72.86 0 top
U$519  ONE_PAD  [1X01]  53.65,72.86 0 top
U$520  ONE_PAD  [1X01]  56.19,72.86 0 top
U$521  ONE_PAD  [1X01]  48.57,70.32 0 top
U$522  ONE_PAD  [1X01]  51.11,70.32 0 top
U$523  ONE_PAD  [1X01]  53.65,70.32 0 top
U$524  ONE_PAD  [1X01]  56.19,70.32 0 top
U$525  ONE_PAD  [1X01]  48.57,67.78 0 top
U$526  ONE_PAD  [1X01]  51.11,67.78 0 top
U$527  ONE_PAD  [1X01]  53.65,67.78 0 top
U$528  ONE_PAD  [1X01]  56.19,67.78 0 top
U$529  ONE_PAD  [1X01]  48.57,65.24 0 top
U$530  ONE_PAD  [1X01]  51.11,65.24 0 top
U$531  ONE_PAD  [1X01]  53.65,65.24 0 top
U$532  ONE_PAD  [1X01]  56.19,65.24 0 top
U$533  ONE_PAD  [1X01]  48.57,62.7 0 top
U$534  ONE_PAD  [1X01]  51.11,62.7 0 top
U$535  ONE_PAD  [1X01]  53.65,62.7 0 top
U$536  ONE_PAD  [1X01]  56.19,62.7 0 top
U$537  ONE_PAD  [1X01]  48.57,60.16 0 top
U$538  ONE_PAD  [1X01]  51.11,60.16 0 top
U$539  ONE_PAD  [1X01]  53.65,60.16 0 top
U$540  ONE_PAD  [1X01]  56.19,60.16 0 top
U$541  ONE_PAD  [1X01]  48.57,57.62 0 top
U$542  ONE_PAD  [1X01]  51.11,57.62 0 top
U$543  ONE_PAD  [1X01]  53.65,57.62 0 top
U$544  ONE_PAD  [1X01]  56.19,57.62 0 top
U$545  ONE_PAD  [1X01]  58.73,72.86 0 top
U$546  ONE_PAD  [1X01]  61.27,72.86 0 top
U$547  ONE_PAD  [1X01]  58.73,60.16 0 top
U$548  ONE_PAD  [1X01]  58.73,70.32 0 top
U$549  ONE_PAD  [1X01]  61.27,70.32 0 top
U$550  ONE_PAD  [1X01]  58.73,57.62 0 top
U$551  ONE_PAD  [1X01]  58.73,67.78 0 top
U$552  ONE_PAD  [1X01]  61.27,67.78 0 top
U$553  ONE_PAD  [1X01]  61.27,60.16 0 top
U$554  ONE_PAD  [1X01]  58.73,65.24 0 top
U$555  ONE_PAD  [1X01]  61.27,65.24 0 top
U$556  ONE_PAD  [1X01]  61.27,57.62 0 top
U$557  ONE_PAD  [1X01]  58.73,62.7 0 top
U$558  ONE_PAD  [1X01]  61.27,62.7 0 top
U$559  GND  [1X01]  46.03,51.91 180 top
U$560  VCC  [1X01]  53.65,51.91 90 top
U$561  SDA  [1X01]  51.11,51.91 0 top
U$562  SCL  [1X01]  48.57,51.91 0 top
U$563  ONE_PAD  [1X01]  56.19,88.1 0 top
U$564  ONE_PAD  [1X01]  56.19,85.56 0 top
U$565  ONE_PAD  [1X01]  56.19,83.02 0 top
U$566  ONE_PAD  [1X01]  53.65,88.1 0 top
U$567  ONE_PAD  [1X01]  53.65,85.56 0 top
U$568  ONE_PAD  [1X01]  53.65,83.02 0 top
U$569  ONE_PAD  [1X01]  51.11,88.1 0 top
U$570  ONE_PAD  [1X01]  51.11,83.02 0 top
U$571  ONE_PAD  [1X01]  51.11,85.56 0 top
U$572  ONE_PAD  [1X01]  48.57,88.1 0 top
U$573  ONE_PAD  [1X01]  48.57,83.02 0 top
U$574  ONE_PAD  [1X01]  48.57,85.56 0 top
U$575  ONE_PAD  [1X01]  46.03,85.56 0 top
U$576  ONE_PAD  [1X01]  46.03,88.1 0 top
U$577  ONE_PAD  [1X01]  46.03,83.02 0 top
U$578  ONE_PAD  [1X01]  43.49,85.56 0 top
U$579  ONE_PAD  [1X01]  43.49,88.1 0 top
U$580  ONE_PAD  [1X01]  43.49,83.02 0 top
U$581  ONE_PAD  [1X01]  38.41,75.4 90 top
U$582  ONE_PAD  [1X01]  38.41,77.94 90 top
U$583  ONE_PAD  [1X01]  38.41,80.48 90 top
U$584  ONE_PAD  [1X01]  56.19,80.48 90 top
U$585  ONE_PAD  [1X01]  40.95,75.4 90 top
U$586  ONE_PAD  [1X01]  40.95,77.94 90 top
U$587  ONE_PAD  [1X01]  40.95,80.48 90 top
U$588  ONE_PAD  [1X01]  58.73,80.48 90 top
U$589  ONE_PAD  [1X01]  43.49,75.4 90 top
U$590  ONE_PAD  [1X01]  43.49,77.94 90 top
U$591  ONE_PAD  [1X01]  43.49,80.48 90 top
U$592  ONE_PAD  [1X01]  61.27,80.48 90 top
U$593  ONE_PAD  [1X01]  46.03,75.4 90 top
U$594  ONE_PAD  [1X01]  46.03,77.94 90 top
U$595  ONE_PAD  [1X01]  46.03,80.48 90 top
U$596  ONE_PAD  [1X01]  58.73,77.94 90 top
U$597  ONE_PAD  [1X01]  48.57,75.4 90 top
U$598  ONE_PAD  [1X01]  48.57,77.94 90 top
U$599  ONE_PAD  [1X01]  48.57,80.48 90 top
U$600  ONE_PAD  [1X01]  61.27,77.94 90 top
U$601  ONE_PAD  [1X01]  51.11,75.4 90 top
U$602  ONE_PAD  [1X01]  51.11,77.94 90 top
U$603  ONE_PAD  [1X01]  51.11,80.48 90 top
U$604  ONE_PAD  [1X01]  58.73,75.4 90 top
U$605  ONE_PAD  [1X01]  53.65,75.4 90 top
U$606  ONE_PAD  [1X01]  53.65,77.94 90 top
U$607  ONE_PAD  [1X01]  53.65,80.48 90 top
U$608  ONE_PAD  [1X01]  61.27,75.4 90 top
U$609  ONE_PAD  [1X01]  56.19,75.4 90 top
U$610  ONE_PAD  [1X01]  56.19,77.94 90 top
U$611  ONE_PAD  [1X01]  71.74,72.86 0 top
U$612  ONE_PAD  [1X01]  71.74,70.32 0 top
U$613  ONE_PAD  [1X01]  71.74,67.78 0 top
U$614  ONE_PAD  [1X01]  71.74,65.24 0 top
U$615  ONE_PAD  [1X01]  71.74,62.7 0 top
U$616  ONE_PAD  [1X01]  71.74,60.16 0 top
U$617  ONE_PAD  [1X01]  71.74,57.62 0 top
U$618  ONE_PAD  [1X01]  74.28,65.24 0 top
U$619  ONE_PAD  [1X01]  74.28,72.86 0 top
U$620  ONE_PAD  [1X01]  74.28,62.7 90 top
U$621  ONE_PAD  [1X01]  74.28,70.32 0 top
U$622  ONE_PAD  [1X01]  74.28,60.16 0 top
U$623  ONE_PAD  [1X01]  74.28,67.78 0 top
U$624  ONE_PAD  [1X01]  74.28,57.62 0 top
U$625  ONE_PAD  [1X01]  76.82,72.86 0 top
U$626  ONE_PAD  [1X01]  79.36,72.86 0 top
U$627  ONE_PAD  [1X01]  76.82,60.16 0 top
U$628  ONE_PAD  [1X01]  76.82,70.32 0 top
U$629  ONE_PAD  [1X01]  79.36,70.32 0 top
U$630  ONE_PAD  [1X01]  76.82,57.62 0 top
U$631  ONE_PAD  [1X01]  76.82,67.78 0 top
U$632  ONE_PAD  [1X01]  79.36,67.78 0 top
U$633  ONE_PAD  [1X01]  79.36,60.16 0 top
U$634  ONE_PAD  [1X01]  76.82,65.24 0 top
U$635  ONE_PAD  [1X01]  79.36,65.24 0 top
U$636  ONE_PAD  [1X01]  79.36,57.62 0 top
U$637  ONE_PAD  [1X01]  76.82,62.7 0 top
U$638  ONE_PAD  [1X01]  79.36,62.7 0 top
U$639  ONE_PAD  [1X01]  81.9,72.86 0 top
U$640  ONE_PAD  [1X01]  84.44,72.86 0 top
U$641  ONE_PAD  [1X01]  86.98,72.86 0 top
U$642  ONE_PAD  [1X01]  89.52,72.86 0 top
U$643  ONE_PAD  [1X01]  81.9,70.32 0 top
U$644  ONE_PAD  [1X01]  84.44,70.32 0 top
U$645  ONE_PAD  [1X01]  86.98,70.32 0 top
U$646  ONE_PAD  [1X01]  89.52,70.32 0 top
U$647  ONE_PAD  [1X01]  81.9,67.78 0 top
U$648  ONE_PAD  [1X01]  84.44,67.78 0 top
U$649  ONE_PAD  [1X01]  86.98,67.78 0 top
U$650  ONE_PAD  [1X01]  89.52,67.78 0 top
U$651  ONE_PAD  [1X01]  81.9,65.24 0 top
U$652  ONE_PAD  [1X01]  84.44,65.24 0 top
U$653  ONE_PAD  [1X01]  86.98,65.24 0 top
U$654  ONE_PAD  [1X01]  89.52,65.24 0 top
U$655  ONE_PAD  [1X01]  81.9,62.7 0 top
U$656  ONE_PAD  [1X01]  84.44,62.7 0 top
U$657  ONE_PAD  [1X01]  86.98,62.7 0 top
U$658  ONE_PAD  [1X01]  89.52,62.7 0 top
U$659  ONE_PAD  [1X01]  81.9,60.16 0 top
U$660  ONE_PAD  [1X01]  84.44,60.16 0 top
U$661  ONE_PAD  [1X01]  86.98,60.16 0 top
U$662  ONE_PAD  [1X01]  89.52,60.16 0 top
U$663  ONE_PAD  [1X01]  81.9,57.62 0 top
U$664  ONE_PAD  [1X01]  84.44,57.62 0 top
U$665  ONE_PAD  [1X01]  86.98,57.62 0 top
U$666  ONE_PAD  [1X01]  89.52,57.62 0 top
U$667  ONE_PAD  [1X01]  92.06,72.86 0 top
U$668  ONE_PAD  [1X01]  94.6,72.86 0 top
U$669  ONE_PAD  [1X01]  92.06,60.16 0 top
U$670  ONE_PAD  [1X01]  92.06,70.32 0 top
U$671  ONE_PAD  [1X01]  94.6,70.32 0 top
U$672  ONE_PAD  [1X01]  92.06,57.62 0 top
U$673  ONE_PAD  [1X01]  92.06,67.78 0 top
U$674  ONE_PAD  [1X01]  94.6,67.78 0 top
U$675  ONE_PAD  [1X01]  94.6,60.16 0 top
U$676  ONE_PAD  [1X01]  92.06,65.24 0 top
U$677  ONE_PAD  [1X01]  94.6,65.24 0 top
U$678  ONE_PAD  [1X01]  94.6,57.62 0 top
U$679  ONE_PAD  [1X01]  92.06,62.7 0 top
U$680  ONE_PAD  [1X01]  94.6,62.7 0 top
U$681  GND  [1X01]  79.36,51.91 180 top
U$682  VCC  [1X01]  86.98,51.91 90 top
U$683  SDA  [1X01]  84.44,51.91 0 top
U$684  SCL  [1X01]  81.9,51.91 0 top
U$685  ONE_PAD  [1X01]  89.52,88.1 0 top
U$686  ONE_PAD  [1X01]  89.52,85.56 0 top
U$687  ONE_PAD  [1X01]  89.52,83.02 0 top
U$688  ONE_PAD  [1X01]  86.98,88.1 0 top
U$689  ONE_PAD  [1X01]  86.98,85.56 0 top
U$690  ONE_PAD  [1X01]  86.98,83.02 0 top
U$691  ONE_PAD  [1X01]  84.44,88.1 0 top
U$692  ONE_PAD  [1X01]  84.44,83.02 0 top
U$693  ONE_PAD  [1X01]  84.44,85.56 0 top
U$694  ONE_PAD  [1X01]  81.9,88.1 0 top
U$695  ONE_PAD  [1X01]  81.9,83.02 0 top
U$696  ONE_PAD  [1X01]  81.9,85.56 0 top
U$697  ONE_PAD  [1X01]  79.36,85.56 0 top
U$698  ONE_PAD  [1X01]  79.36,88.1 0 top
U$699  ONE_PAD  [1X01]  79.36,83.02 0 top
U$700  ONE_PAD  [1X01]  76.82,85.56 0 top
U$701  ONE_PAD  [1X01]  76.82,88.1 0 top
U$702  ONE_PAD  [1X01]  76.82,83.02 0 top
U$703  ONE_PAD  [1X01]  71.74,75.4 90 top
U$704  ONE_PAD  [1X01]  71.74,77.94 90 top
U$705  ONE_PAD  [1X01]  71.74,80.48 90 top
U$706  ONE_PAD  [1X01]  89.52,80.48 90 top
U$707  ONE_PAD  [1X01]  74.28,75.4 90 top
U$708  ONE_PAD  [1X01]  74.28,77.94 90 top
U$709  ONE_PAD  [1X01]  74.28,80.48 90 top
U$710  ONE_PAD  [1X01]  92.06,80.48 90 top
U$711  ONE_PAD  [1X01]  76.82,75.4 90 top
U$712  ONE_PAD  [1X01]  76.82,77.94 90 top
U$713  ONE_PAD  [1X01]  76.82,80.48 90 top
U$714  ONE_PAD  [1X01]  94.6,80.48 90 top
U$715  ONE_PAD  [1X01]  79.36,75.4 90 top
U$716  ONE_PAD  [1X01]  79.36,77.94 90 top
U$717  ONE_PAD  [1X01]  79.36,80.48 90 top
U$718  ONE_PAD  [1X01]  92.06,77.94 90 top
U$719  ONE_PAD  [1X01]  81.9,75.4 90 top
U$720  ONE_PAD  [1X01]  81.9,77.94 90 top
U$721  ONE_PAD  [1X01]  81.9,80.48 90 top
U$722  ONE_PAD  [1X01]  94.6,77.94 90 top
U$723  ONE_PAD  [1X01]  84.44,75.4 90 top
U$724  ONE_PAD  [1X01]  84.44,77.94 90 top
U$725  ONE_PAD  [1X01]  84.44,80.48 90 top
U$726  ONE_PAD  [1X01]  92.06,75.4 90 top
U$727  ONE_PAD  [1X01]  86.98,75.4 90 top
U$728  ONE_PAD  [1X01]  86.98,77.94 90 top
U$729  ONE_PAD  [1X01]  86.98,80.48 90 top
U$730  ONE_PAD  [1X01]  94.6,75.4 90 top
U$731  ONE_PAD  [1X01]  89.52,75.4 90 top
U$732  ONE_PAD  [1X01]  89.52,77.94 90 top
VCC  10X-PADS  [10X-PADS]  30.48,30.48 0 top
VCC1  10X-PADS  [10X-PADS]  63.81,30.48 0 top
VCC2  10X-PADS  [10X-PADS]  97.14,30.48 0 top
VCC3  10X-PADS  [10X-PADS]  30.48,80.48 0 top
VCC4  10X-PADS  [10X-PADS]  63.81,80.48 0 top
VCC5  10X-PADS  [10X-PADS]  97.14,80.48 0 top

## Library data of the parts
C1-C6 = SparkFun-Capacitors; PROD_ID: CAP-08604
GND GND1-GND5 HELLO HELLO1-HELLO5 POWER POWER1-POWER5 U$1-U$732 VCC VCC1-VCC5 = BadgeParts
IC1-IC6 = BadgeParts; ARROW_PART_NUMBER: ATTINY85-20SU; ARROW_PRICE/STOCK: https://www.arrow.com/en/products/attiny85-20su/microchip-technology; DESCRIPTION: MICROCHIP - ATTINY85-20SU - MICROCONTROLLER MCU, 8 BIT, ATTINY, 20MHZ, SOIC-8; HEIGHT: 2.16mm; MANUFACTURER_NAME: Microchip; MANUFACTURER_PART_NUMBER: ATTINY85-20SU; RS_PART_NUMBER: 1331674; RS_PRICE/STOCK: http://uk.rs-online.com/web/p/products/1331674
J1-J6 = BadgeParts; ARROW_PART_NUMBER: M20-9980346; ARROW_PRICE/STOCK: http://uk.rs-online.com/web/p/products/7457046P; DESCRIPTION: 03+03 DIL Vertical Pin Header HARWIN M20 Series, 2.54mm Pitch 6 Way 2 Row Straight PCB Header, Solder Termination, 3A; HEIGHT: 8.68mm; MANUFACTURER_NAME: HARWIN; MANUFACTURER_PART_NUMBER: M20-9980346; RS_PART_NUMBER: 7457046P; RS_PRICE/STOCK: http://uk.rs-online.com/web/p/products/7457046P
R1-R12 = SparkFun-Resistors

## Nets
GND [GND]: C1.1 GND.P$1 GND.P$2 GND.P$3 GND.P$4 GND.P$5 GND.P$6 GND.P$7 GND.P$8 GND.P$9 GND.P$10 HELLO.NEG IC1.GND J1.GND POWER.NEG U$71.1
GND1 [GND]: C2.1 GND1.P$1 GND1.P$2 GND1.P$3 GND1.P$4 GND1.P$5 GND1.P$6 GND1.P$7 GND1.P$8 GND1.P$9 GND1.P$10 HELLO1.NEG IC2.GND J2.GND POWER1.NEG U$193.1
GND2 [GND]: C3.1 GND2.P$1 GND2.P$2 GND2.P$3 GND2.P$4 GND2.P$5 GND2.P$6 GND2.P$7 GND2.P$8 GND2.P$9 GND2.P$10 HELLO2.NEG IC3.GND J3.GND POWER2.NEG U$315.1
GND3 [GND]: C4.1 GND3.P$1 GND3.P$2 GND3.P$3 GND3.P$4 GND3.P$5 GND3.P$6 GND3.P$7 GND3.P$8 GND3.P$9 GND3.P$10 HELLO3.NEG IC4.GND J4.GND POWER3.NEG U$437.1
GND4 [GND]: C5.1 GND4.P$1 GND4.P$2 GND4.P$3 GND4.P$4 GND4.P$5 GND4.P$6 GND4.P$7 GND4.P$8 GND4.P$9 GND4.P$10 HELLO4.NEG IC5.GND J5.GND POWER4.NEG U$559.1
GND5 [GND]: C6.1 GND5.P$1 GND5.P$2 GND5.P$3 GND5.P$4 GND5.P$5 GND5.P$6 GND5.P$7 GND5.P$8 GND5.P$9 GND5.P$10 HELLO5.NEG IC6.GND J6.GND POWER5.NEG U$681.1
N$1: POWER.POS R1.P$1
N$2: POWER1.POS R3.P$1
N$3: HELLO.POS R2.P$1
N$4: HELLO1.POS R4.P$1
N$5: POWER2.POS R5.P$1
N$6: HELLO2.POS R6.P$1
N$7: POWER3.POS R7.P$1
N$8: HELLO3.POS R8.P$1
N$9: POWER4.POS R9.P$1
N$10: HELLO4.POS R10.P$1
N$11: POWER5.POS R11.P$1
N$12: HELLO5.POS R12.P$1
PB0: IC1.PB0 J1.0/MOSI/SDA R2.P$2 U$72.1 U$75.1 U$76.1 U$77.1
PB1: IC1.PB1 J1.1/MISO U$78.1 U$79.1 U$80.1
PB2: IC1.PB2 J1.2/SCK/SCL U$73.1 U$81.1 U$82.1 U$83.1
PB3: IC1.PB3 U$84.1 U$85.1 U$86.1
PB4: IC1.PB4 U$87.1 U$88.1 U$89.1
PB5: IC1.PB5 J1.5/RST U$90.1 U$91.1 U$92.1
PB6: IC2.PB0 J2.0/MOSI/SDA R4.P$2 U$195.1 U$197.1 U$198.1 U$199.1
PB7: IC2.PB3 U$206.1 U$207.1 U$208.1
PB8: IC2.PB4 U$209.1 U$210.1 U$211.1
PB9: IC2.PB2 J2.2/SCK/SCL U$196.1 U$203.1 U$204.1 U$205.1
PB10: IC2.PB5 J2.5/RST U$212.1 U$213.1 U$214.1
PB11: IC2.PB1 J2.1/MISO U$200.1 U$201.1 U$202.1
PB12: IC3.PB0 J3.0/MOSI/SDA R6.P$2 U$317.1 U$319.1 U$320.1 U$321.1
PB13: IC3.PB3 U$328.1 U$329.1 U$330.1
PB14: IC3.PB4 U$331.1 U$332.1 U$333.1
PB15: IC3.PB2 J3.2/SCK/SCL U$318.1 U$325.1 U$326.1 U$327.1
PB16: IC3.PB5 J3.5/RST U$334.1 U$335.1 U$336.1
PB17: IC3.PB1 J3.1/MISO U$322.1 U$323.1 U$324.1
PB18: IC4.PB0 J4.0/MOSI/SDA R8.P$2 U$439.1 U$441.1 U$442.1 U$443.1
PB19: IC4.PB3 U$450.1 U$451.1 U$452.1
PB20: IC4.PB4 U$453.1 U$454.1 U$455.1
PB21: IC4.PB2 J4.2/SCK/SCL U$440.1 U$447.1 U$448.1 U$449.1
PB22: IC4.PB5 J4.5/RST U$456.1 U$457.1 U$458.1
PB23: IC4.PB1 J4.1/MISO U$444.1 U$445.1 U$446.1
PB24: IC5.PB0 J5.0/MOSI/SDA R10.P$2 U$561.1 U$563.1 U$564.1 U$565.1
PB25: IC5.PB3 U$572.1 U$573.1 U$574.1
PB26: IC5.PB4 U$575.1 U$576.1 U$577.1
PB27: IC5.PB2 J5.2/SCK/SCL U$562.1 U$569.1 U$570.1 U$571.1
PB28: IC5.PB5 J5.5/RST U$578.1 U$579.1 U$580.1
PB29: IC5.PB1 J5.1/MISO U$566.1 U$567.1 U$568.1
PB30: IC6.PB0 J6.0/MOSI/SDA R12.P$2 U$683.1 U$685.1 U$686.1 U$687.1
PB31: IC6.PB3 U$694.1 U$695.1 U$696.1
PB32: IC6.PB4 U$697.1 U$698.1 U$699.1
PB33: IC6.PB2 J6.2/SCK/SCL U$684.1 U$691.1 U$692.1 U$693.1
PB34: IC6.PB5 J6.5/RST U$700.1 U$701.1 U$702.1
PB35: IC6.PB1 J6.1/MISO U$688.1 U$689.1 U$690.1
VCC [VCC]: C1.2 IC1.VCC J1.VCC R1.P$2 U$74.1 VCC.P$1 VCC.P$2 VCC.P$3 VCC.P$4 VCC.P$5 VCC.P$6 VCC.P$7 VCC.P$8 VCC.P$9 VCC.P$10
VCC1 [VCC]: C2.2 IC2.VCC J2.VCC R3.P$2 U$194.1 VCC1.P$1 VCC1.P$2 VCC1.P$3 VCC1.P$4 VCC1.P$5 VCC1.P$6 VCC1.P$7 VCC1.P$8 VCC1.P$9 VCC1.P$10
VCC2 [VCC]: C3.2 IC3.VCC J3.VCC R5.P$2 U$316.1 VCC2.P$1 VCC2.P$2 VCC2.P$3 VCC2.P$4 VCC2.P$5 VCC2.P$6 VCC2.P$7 VCC2.P$8 VCC2.P$9 VCC2.P$10
VCC3 [VCC]: C4.2 IC4.VCC J4.VCC R7.P$2 U$438.1 VCC3.P$1 VCC3.P$2 VCC3.P$3 VCC3.P$4 VCC3.P$5 VCC3.P$6 VCC3.P$7 VCC3.P$8 VCC3.P$9 VCC3.P$10
VCC4 [VCC]: C5.2 IC5.VCC J5.VCC R9.P$2 U$560.1 VCC4.P$1 VCC4.P$2 VCC4.P$3 VCC4.P$4 VCC4.P$5 VCC4.P$6 VCC4.P$7 VCC4.P$8 VCC4.P$9 VCC4.P$10
VCC5 [VCC]: C6.2 IC6.VCC J6.VCC R11.P$2 U$682.1 VCC5.P$1 VCC5.P$2 VCC5.P$3 VCC5.P$4 VCC5.P$5 VCC5.P$6 VCC5.P$7 VCC5.P$8 VCC5.P$9 VCC5.P$10